# Altium PCB DVT-ClockGenerator.PcbDoc
Units mm, origin at the board's own origin, x right, y up, seen from the top; angles counter-clockwise.
Board outline 44 x 30 mm, 2 copper layers (Top Layer, Bottom Layer); 10 components, 8 nets, 45 pads, 2 vias.
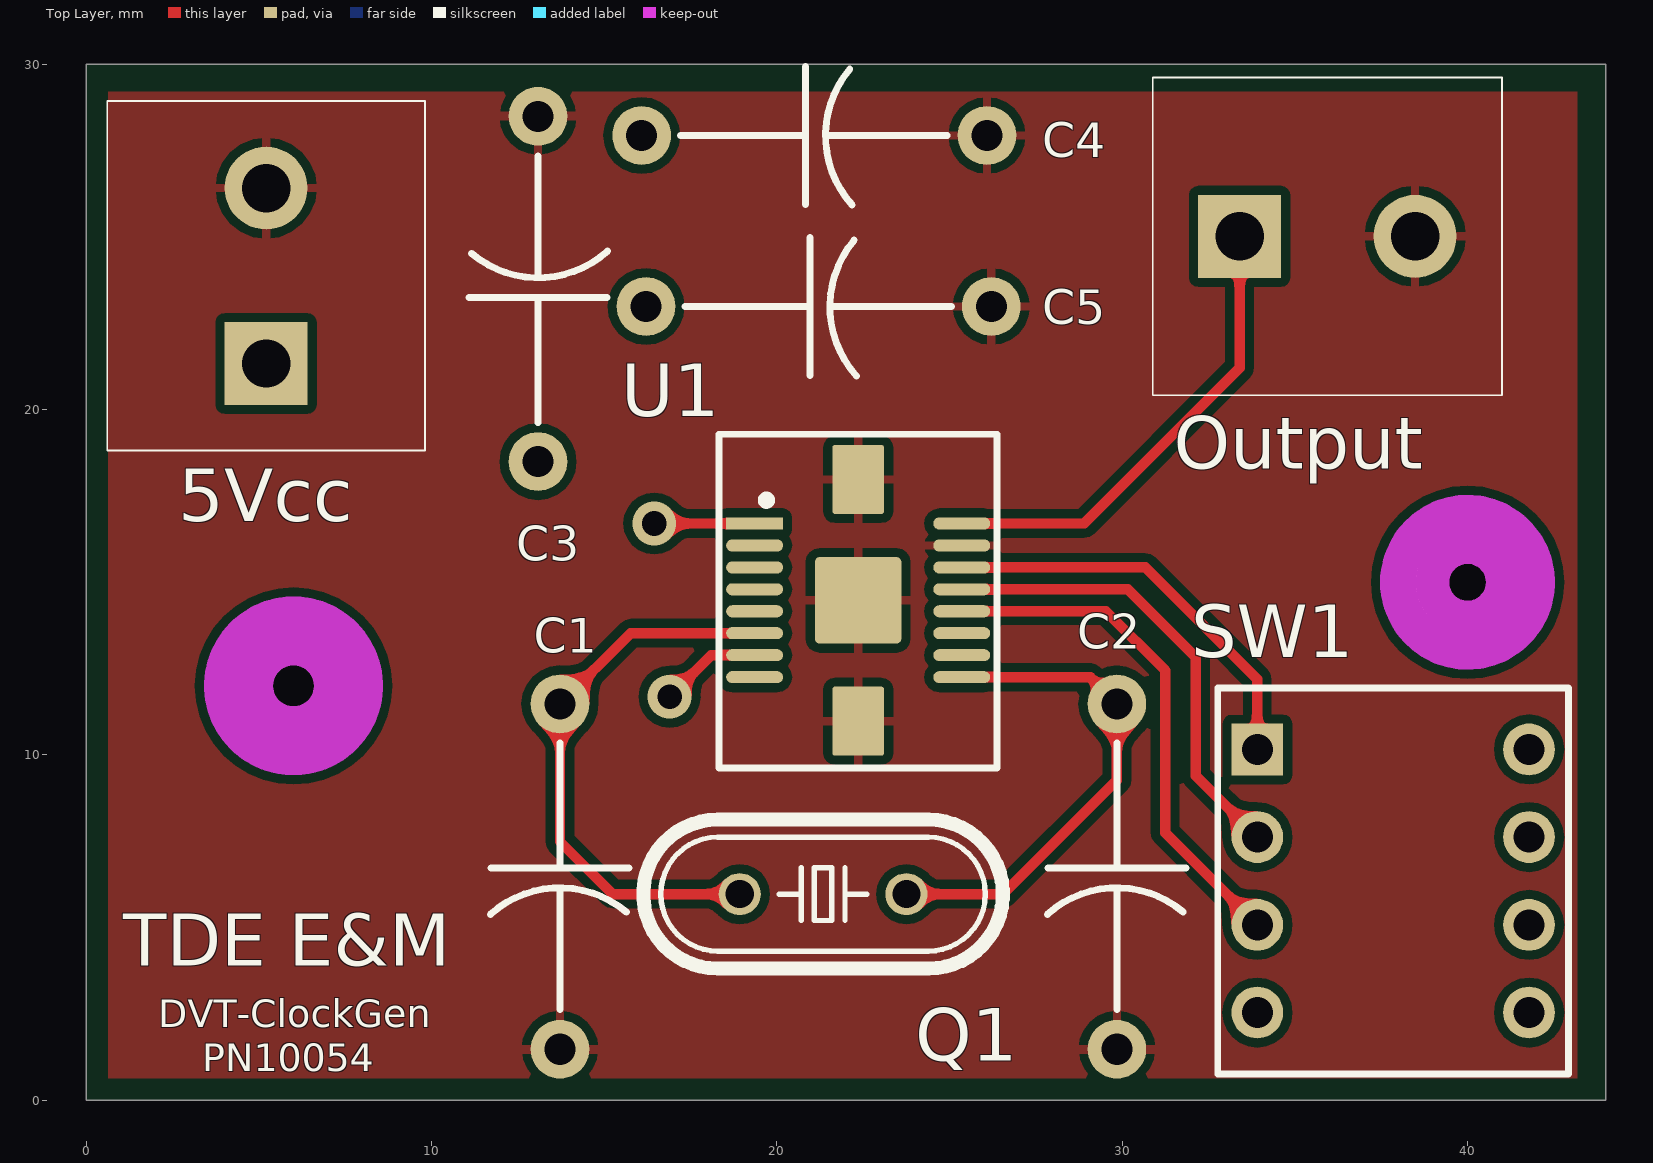
[diagram p0: Top Layer view]
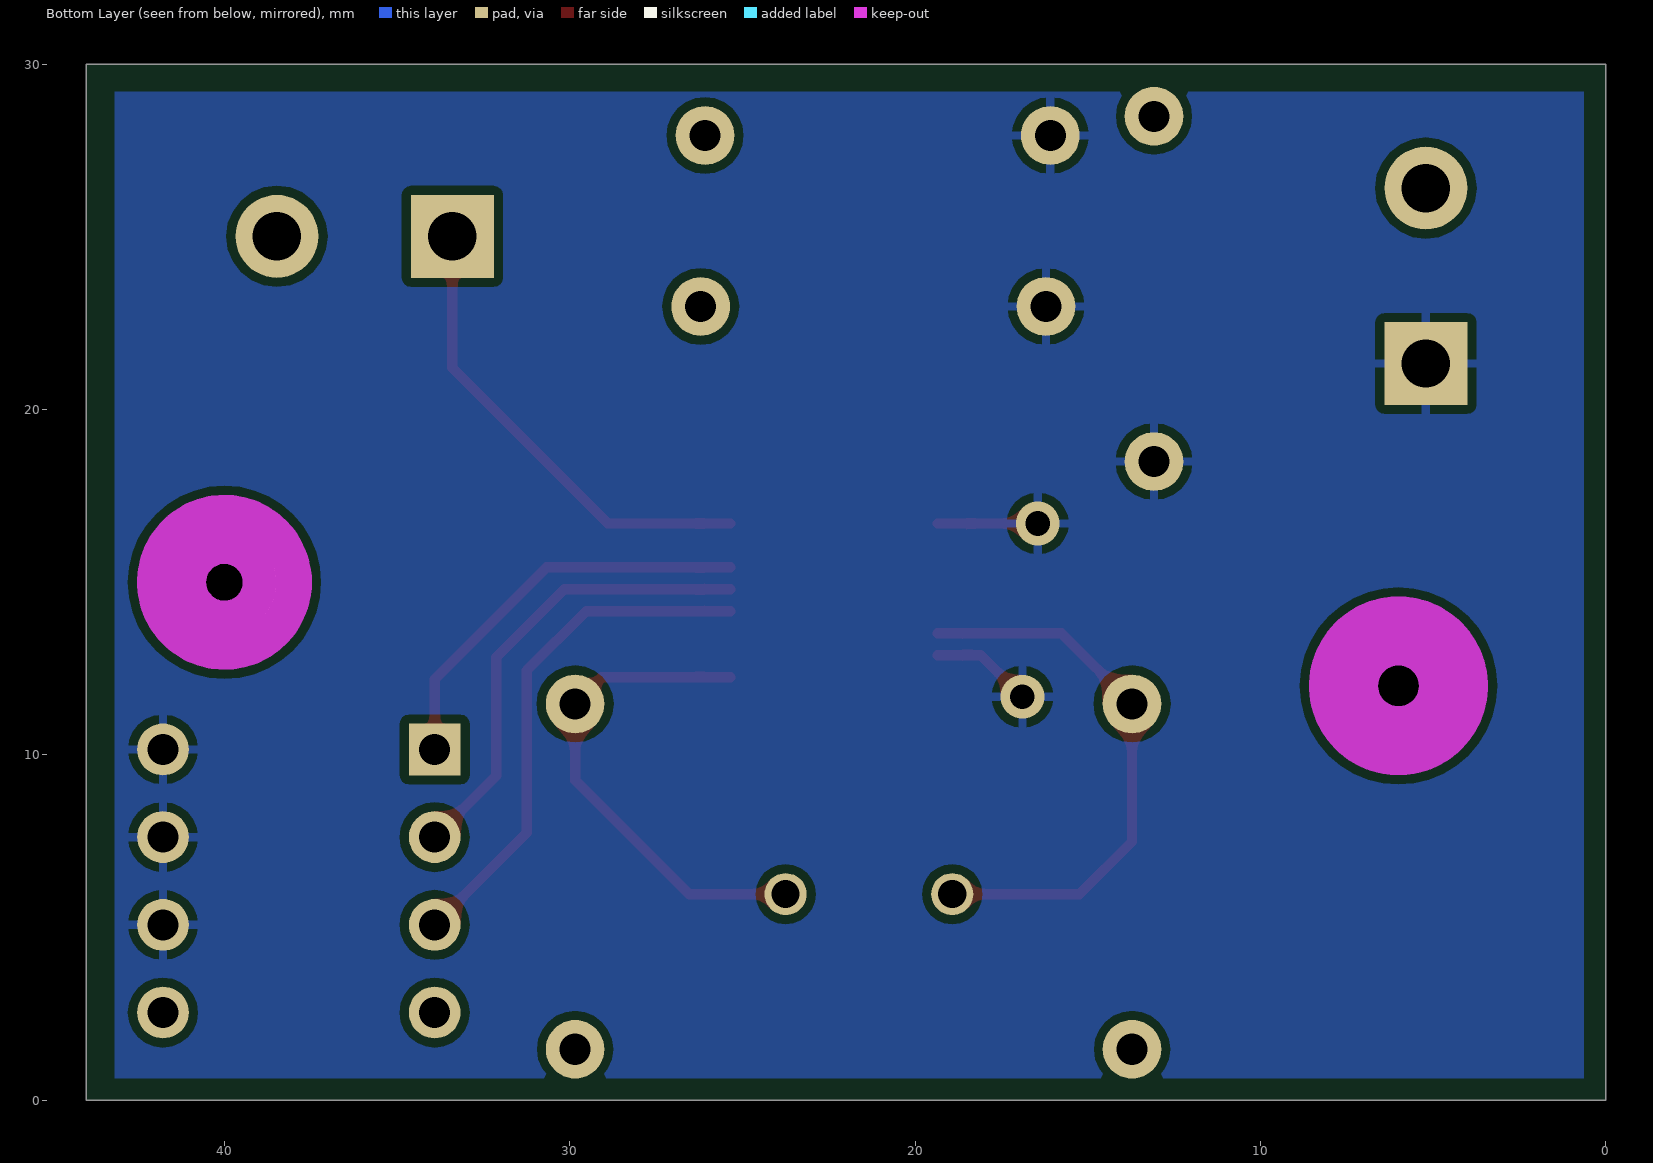
[diagram p1: Bottom Layer view, seen from below]
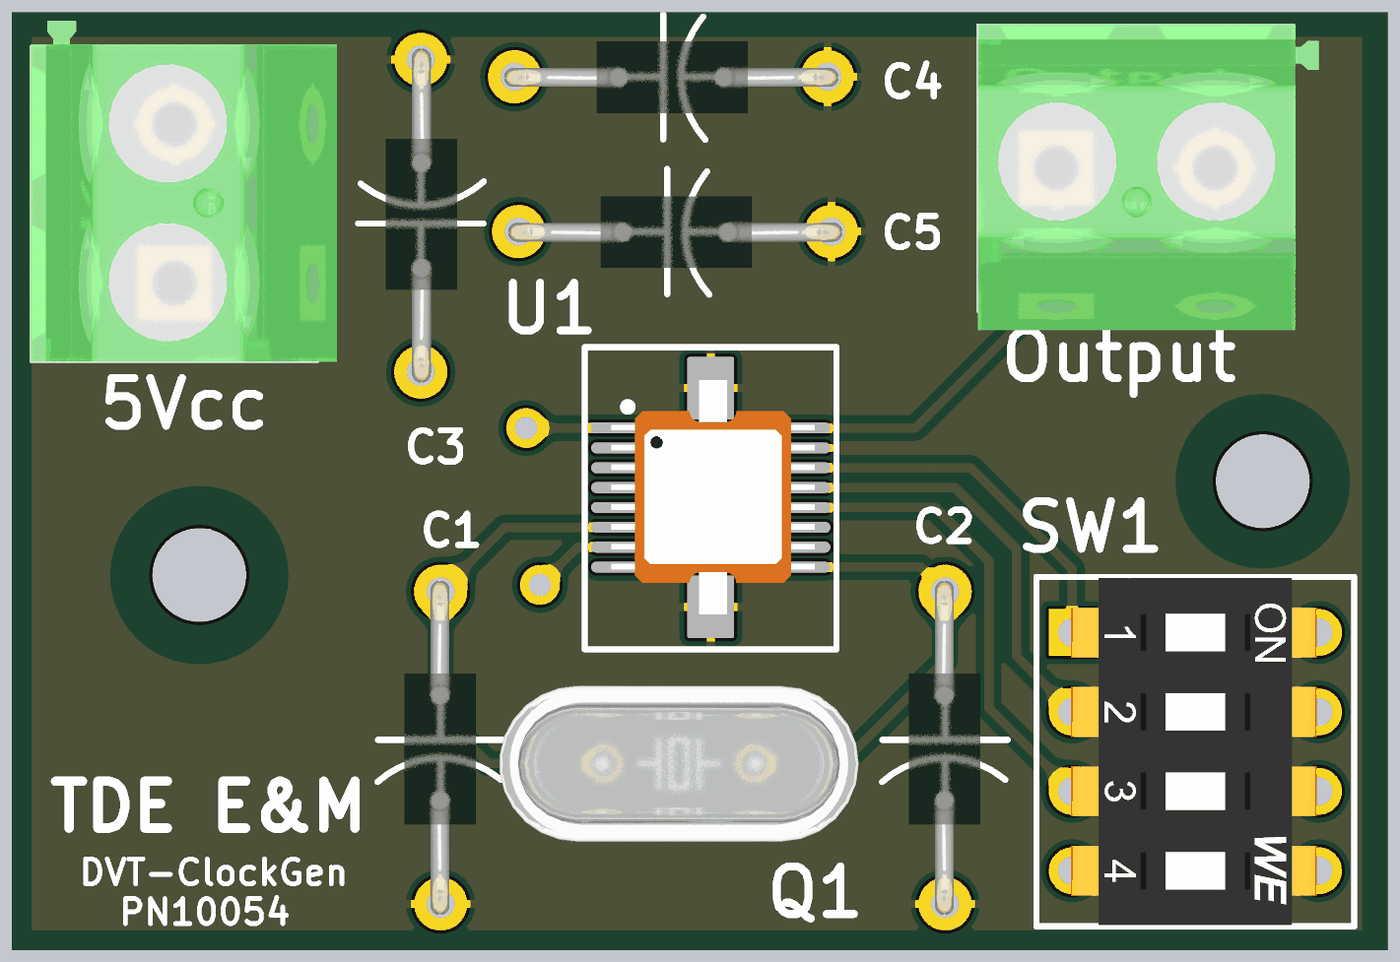
[diagram p2: 3D render of the assembled board from above, using the file's embedded part models]

## Layer stack, top to bottom
Top Solder: solder mask 0.0102, Solder Resist, Dk 3.5
Top Layer: signal copper 0.0356
Dielectric 1: dielectric 0.32, FR-4, Dk 4.8
Bottom Layer: signal copper 0.0356
Bottom Solder: solder mask 0.0102, Solder Resist, Dk 3.5

## Board outline
0,0 44,0 44,30 0,30

## Design rules (kind name [scope] priority, off if disabled: settings)
Clearance Polygons [InPolygon] p1: gap=0.254 ignorepadtopadclearanceinfootprint=FALSE except(0: Arc-Hole Track-Hole SMDPad-Hole THPad-Hole Via-Hole Fill-Hole Poly-Hole Region-Hole Text-Hole)
Clearance [All] p2: gap=0.15 ignorepadtopadclearanceinfootprint=FALSE except(0: Arc-Hole Track-Hole SMDPad-Hole THPad-Hole Via-Hole Fill-Hole Poly-Hole Region-Hole Text-Hole)
MinimumSolderMaskSliver [All] p1: minsoldermaskwidth=0.1
PolygonConnect [All] p1: connectstyle=Relief reliefconductorwidth=0.254 reliefentries=4 polygonreliefangle="90 Angle" airgapwidth=0.254
RoomDefinition DVT-ClockGenerator [InComponentClass('DVT-ClockGenerator')] p1: confinementstyle=ConfineIn formatcopy=TRUE lockcomponents=FALSE outline -4.318,-4.191 47.625,-4.191 47.625,32.893 -4.318,32.893
RoutingVias [All] p1: holewidth=0.711 width=1.27 viastyle="Through Hole" minholewidth=0 minwidth=0 maxholewidth=0.711 maxwidth=1.27
SilkToSilkClearance [All] p1: silktosilkclearance=0
SilkToSolderMaskClearance [IsPad] p1: minsilkscreentomaskgap=0.1 clearancetoexposedcopper=TRUE
SolderMaskExpansion [All] p1: expansion=0.102
Width [All] p1: maxlimit=4 minlimit=0.254 preferedwidth=0.5
27 further rules are at their usual default settings.

## Components (designator, comment, footprint, x,y, rotation, side; value= is the part's Value field where it differs from the comment)
5Vcc "PHOENIX_1715721" Phoenix-2-5_08 5.207,23.876 r90 top
C1 "Capacitor-Dummy-THT" Dummy-10mm 13.716,6.477 r270 top value=10pF
C2 "Capacitor-Dummy-THT" Dummy-10mm 29.845,6.477 r270 top value=10pF
C3 "Capacitor-Dummy-THT" Dummy-10mm 13.081,23.495 r90 top value=100pF
C4 "Capacitor-Dummy-THT" Dummy-10mm 21.082,27.94 r0 top value=100nF
C5 "Capacitor-Dummy-THT" Dummy-10mm 21.209,22.987 r0 top value=100nF
Output "PHOENIX_1715721" Phoenix-2-5_08 35.941,25.019 r0 top
Q1 "Crystal_HC49-U_THT" HC49-U 21.336,5.969 r0 top value=Value
SW1 "WS-DITV-4DIP" DIP-8-Ceramic-HT 37.846,6.35 r270 top
U1 "CG50LP" TDFP16 22.352,14.478 r0 top

## Footprints (in the part's own frame and the unit in brackets; to place one, negate y for a bottom-side part, rotate by r counter-clockwise, add the part's x,y. Pads: shape width x height; smd on the part's side, far side on the other; paste and mask are expansions set on the pad)
DIP-8-Ceramic-HT [mm] "DIP; 8 Leads; Row Spacing 7.62 mm; Pitch 2.54 mm"
  rect 1.5x1.5 hole 0.9: 1(-3.81,-3.935)
  round 1.5 hole 0.9: 2(-1.27,-3.935) 3(1.27,-3.935) 4(3.81,-3.935) 5(3.81,3.935) 6(1.27,3.935) 7(-1.27,3.935) 8(-3.81,3.935)
  silkscreen extent -5.59,-5.08 5.59,5.08, body extent -5.55,-3.98 5.55,3.89, height 4.65
Dummy-10mm [mm] "Dummy-10mm"
  round 1.7 hole 0.9: 1(-5,0) 2(5,0)
  silkscreen extent -3.88,-2.01 3.85,2, body extent -5.34,-1.16 5.35,1.13, height 7.83
HC49-U [mil] "HC49-U"
  round 48 hole 32: 1(-95,0) 2(95,0)
  silkscreen extent -205,-85 205,85, body extent -226,-99 226,98, height 538
Phoenix-2-5_08 [mm] "Phoenix, 1715721"
  rect 2.4x2.4 hole 1.4: 1(-2.54,0)
  round 2.4 hole 1.4: 2(2.54,0)
  silkscreen extent -5.06,-4.6 5.06,4.6, body extent -5.05,-5.19 5.85,4.61, height 14.2
TDFP16 [mm] "TDFP16"
  rect 1.65x0.35 smd: 1(-3,2.225)
  oval 1.65x0.35 smd: 2(-3,1.587) 3(-3,0.953) 4(-3,0.318) 5(-3,-0.318) 6(-3,-0.953) 7(-3,-1.587) 8(-3,-2.225) 9(3,-2.225) 10(3,-1.587) 11(3,-0.953) 12(3,-0.318) 13(3,0.318) 14(3,0.953) 15(3,1.587) 16(3,2.225)
  rrect10% 2.5x2.5 smd: 17(0,0)
  rrect10% 1.5x2 smd: 18(0,3.5) 19(0,-3.5)
  silkscreen extent -4.03,-4.85 4.02,4.81, body extent -3.18,-3.74 3.32,3.76, height 1.15

## Part data
5Vcc Output: library part 2Pol_1715721, "Phoenix, 2 pol, 5.08mm, 22A, 715721", Deliverer PartNr=193-0564, Manufacturer=Phoenix, Manufacturer PartNr=1715721, Deliverer=RS, LatestRevisionDate=02.05.2014, LatestRevisionNote="Re-released for DXP Platform.", PackageDescription=Phoenix-2-5_08, Price=0.976/5, Publisher="Sebastian Kulik", TDE-PN=CON0008
C1 C2: Deliverer PartNr=2452198, Manufacturer=Kemet, Manufacturer PartNr=C052H100J2G5GA, Deliverer=Farnell, PackageDescription=-, Part Description=Capacitor-Dummy-THT, Price=15.09/1, Published=08.12.2015, Publisher="Sebastian Kulik", TDE-PN=-
C3: Deliverer PartNr=117-344, Manufacturer=-, Deliverer=RS, Manufacturer PartNr=-, PackageDescription=-, Part Description=Capacitor-Dummy-THT, Price=0.09/10, Published=08.12.2015, Publisher="Sebastian Kulik", TDE-PN=-
C4 C5: Deliverer PartNr=721-5240, Manufacturer=-, Deliverer=RS, Manufacturer PartNr=-, PackageDescription=-, Part Description=Capacitor-Dummy-THT, Price=0.081/50, Published=08.12.2015, Publisher="Sebastian Kulik", TDE-PN=-
Q1: library part Crystal_HC49-U, "Crystal_HC49-U Uni", Deliverer=RS, PackageDescription=HC-49U, Published=22.11.2016, Publisher="Sebastian Kulik"
SW1: "4 way DIP switch", Deliverer PartNr=418127270904, Manufacturer=WE, Deliverer=WE, Manufacturer PartNr=418127270904, PackageDescription=DIP-8, Published=20.07.2016, Publisher="Sebastian Kulik", TDFE-PN=M0015
U1: "VERSATILE CRYSTAL CLOCK GENERATOR - 2ND GEN", Manufacturer=CISSOID, Deliverer=CISSOID, Deliverer PartNr=CG50LP, Manufacturer PartNr=CG50LP, PackageDescription=TDFP16, Price=--, Published=22.11.2016, Publisher="Sebastian Kulik", TDE-PN=IC0085

## Free pads (board coordinates)
  round 3 hole 3 unplated: 0(6,12) 0(40,15)

## Via types
v1: diameter 1.27, hole 0.711, Top Layer to Bottom Layer, 2 vias

## Nets (pads, with @x,y where several pads share a name; then routed paths per layer and width w, separated by ;. In a path a pad name is that pad's centre, name@x,y a point inside that pad or via, vN(x,y) a via of type N, cw(c..) or ccw(c..) an arc to the next point about the centre after c; other vN are vias at no path point)
NetC1_1: C1.1 Q1.1 U1.6 | length 16.3
  Top Layer w0.3: Q1.1 15.24,5.969 13.716,7.493 C1.1 15.764,13.525 U1.6
NetC2_1: C2.1 Q1.2 U1.9 | length 14.5
  Top Layer w0.3: Q1.2 26.543,5.969 29.845,9.271 C2.1 29.069,12.253 U1.9
NetOutput_1: Output.1 U1.16 | length 13.7
  Top Layer w0.3: U1.16 28.895,16.703 33.401,21.209 Output.1
NetSW1_1: SW1.1 U1.14 | length 11.9
  Top Layer w0.3: U1.14 30.67,15.43 33.909,12.192 33.909,10.162 SW1.1
NetSW1_2: SW1.2 U1.13 | length 13.5
  Top Layer w0.3: U1.13 30.162,14.795 32.131,12.827 32.131,9.4 SW1.2
NetSW1_3: SW1.3 U1.12 | length 15.1
  Top Layer w0.3: U1.12 29.527,14.16 31.242,12.446 31.242,7.749 SW1.3
Vdd: 5Vcc.1 C3.1 C4.1 C5.1 SW1.6 SW1.7 SW1.8 U1.1 U1.7 | length 5.9
  Top Layer w0.3: v1(16.449,16.703) U1.1 ; v1(16.891,11.684) 18.098,12.89 U1.7
Vss: 5Vcc.2 C1.2 C2.2 C3.2 C4.2 C5.2 Output.2 U1.15 U1.17 U1.18 U1.19
pads on no net: SW1.4 SW1.5 U1.2 U1.3 U1.4 U1.5 U1.8 U1.10 U1.11

## Polygon pours and split planes (outlines as drawn)
Vdd on Bottom Layer "Vcc-Bottom" (solid, pour order 2): 0.635,0.635 0.635,29.21 43.18,29.21 43.18,0.635
Vss on Top Layer "Vss-Top" (solid, pour order 0): 0.635,0.635 0.635,29.21 43.18,29.21 43.18,0.635

## Keep-outs
Keep-Out Layer:
  circle w2: c40,15 r1.532
  circle w2: c6,12 r1.592

## Silkscreen, mask and mechanical layers (free items; w line width, h text height)
Top Overlay:
  text "TDE E&M" at 1.064,3.889 h1.5
  text "DVT-ClockGen" at 2.08,2.111 h0.8
  text "PN10054" at 3.35,0.841 h0.8
outline:
  the board outline again, w0.254

## Dimensions
0,0 to 44,0 on Mechanical 16
44,0 to 44,30 on Mechanical 16